# Altium PCB Bop-it_PCB.PcbDoc
Units mil, origin at the board's own origin, x right, y up, seen from the top; angles counter-clockwise.
Board outline 4115 x 4000 mil, 2 copper layers (Top Layer, Bottom Layer); 26 components, 32 nets, 143 pads, 0 vias.
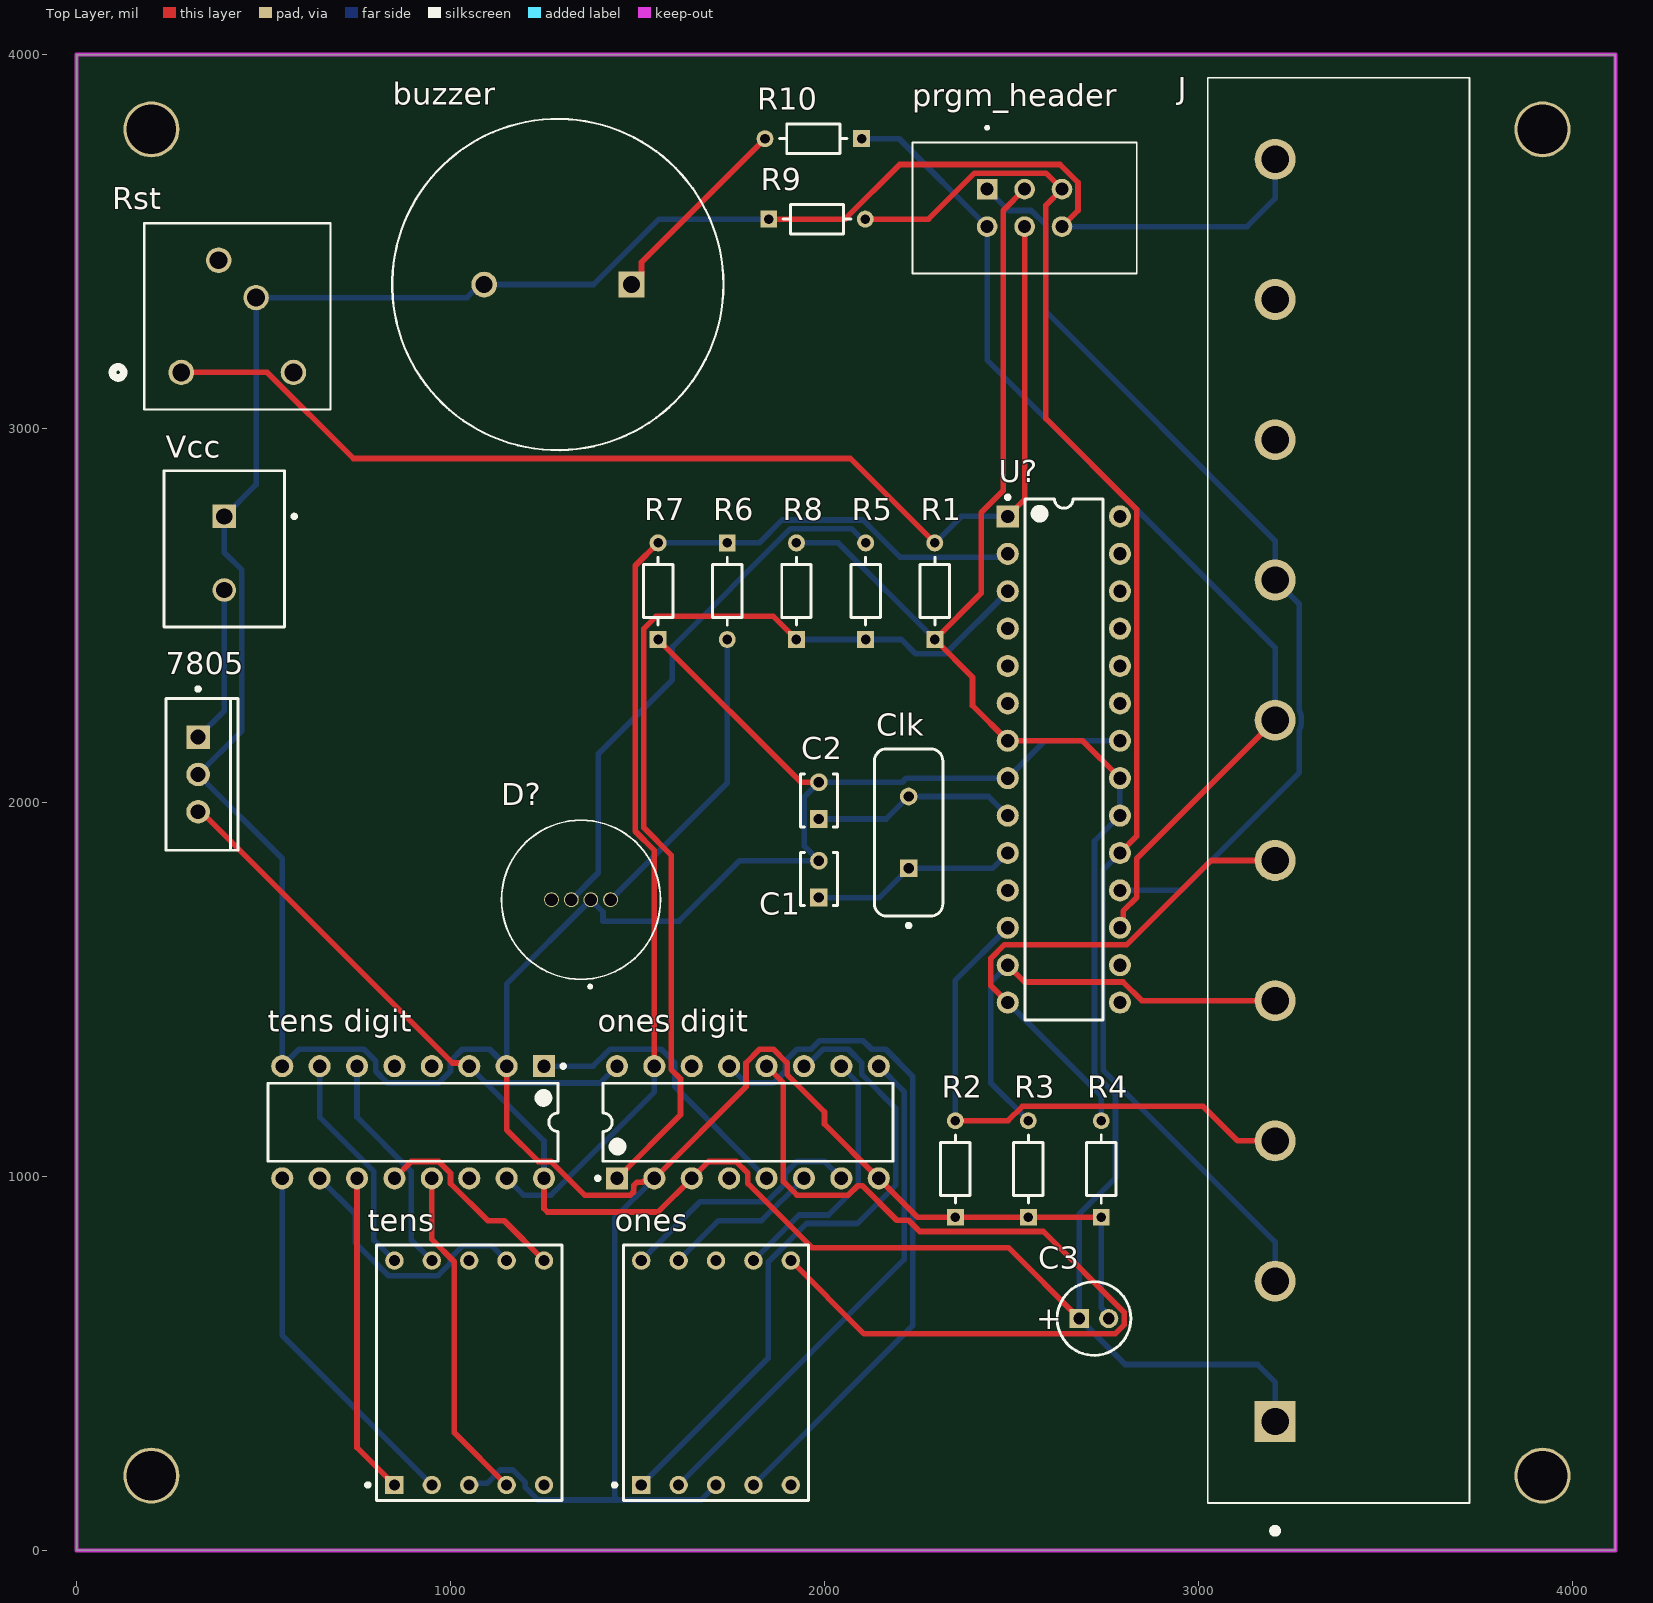
[diagram p0: Top Layer view]
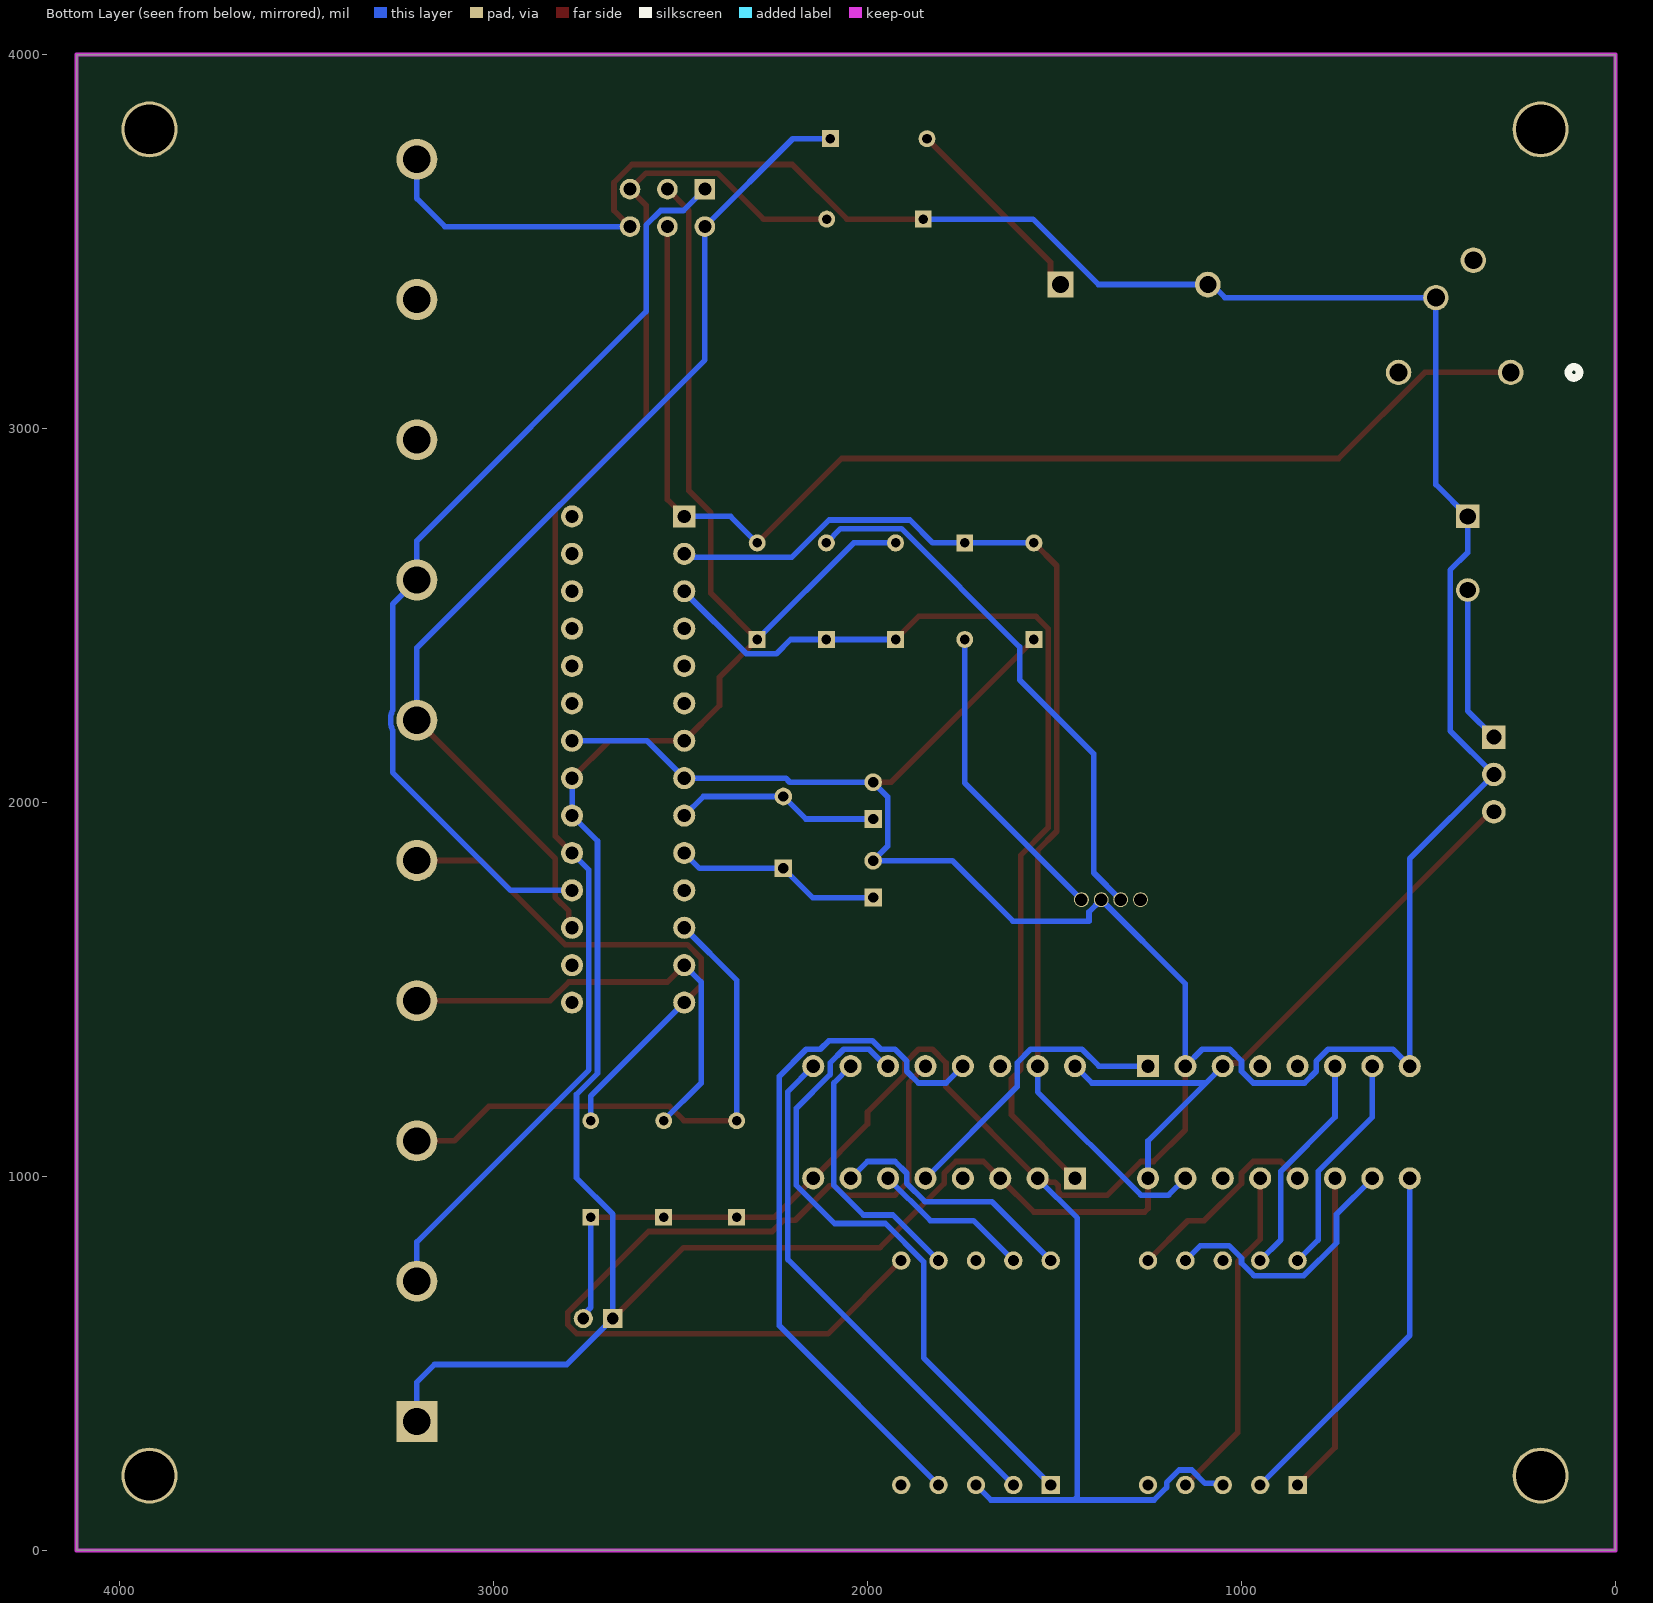
[diagram p1: Bottom Layer view, seen from below]
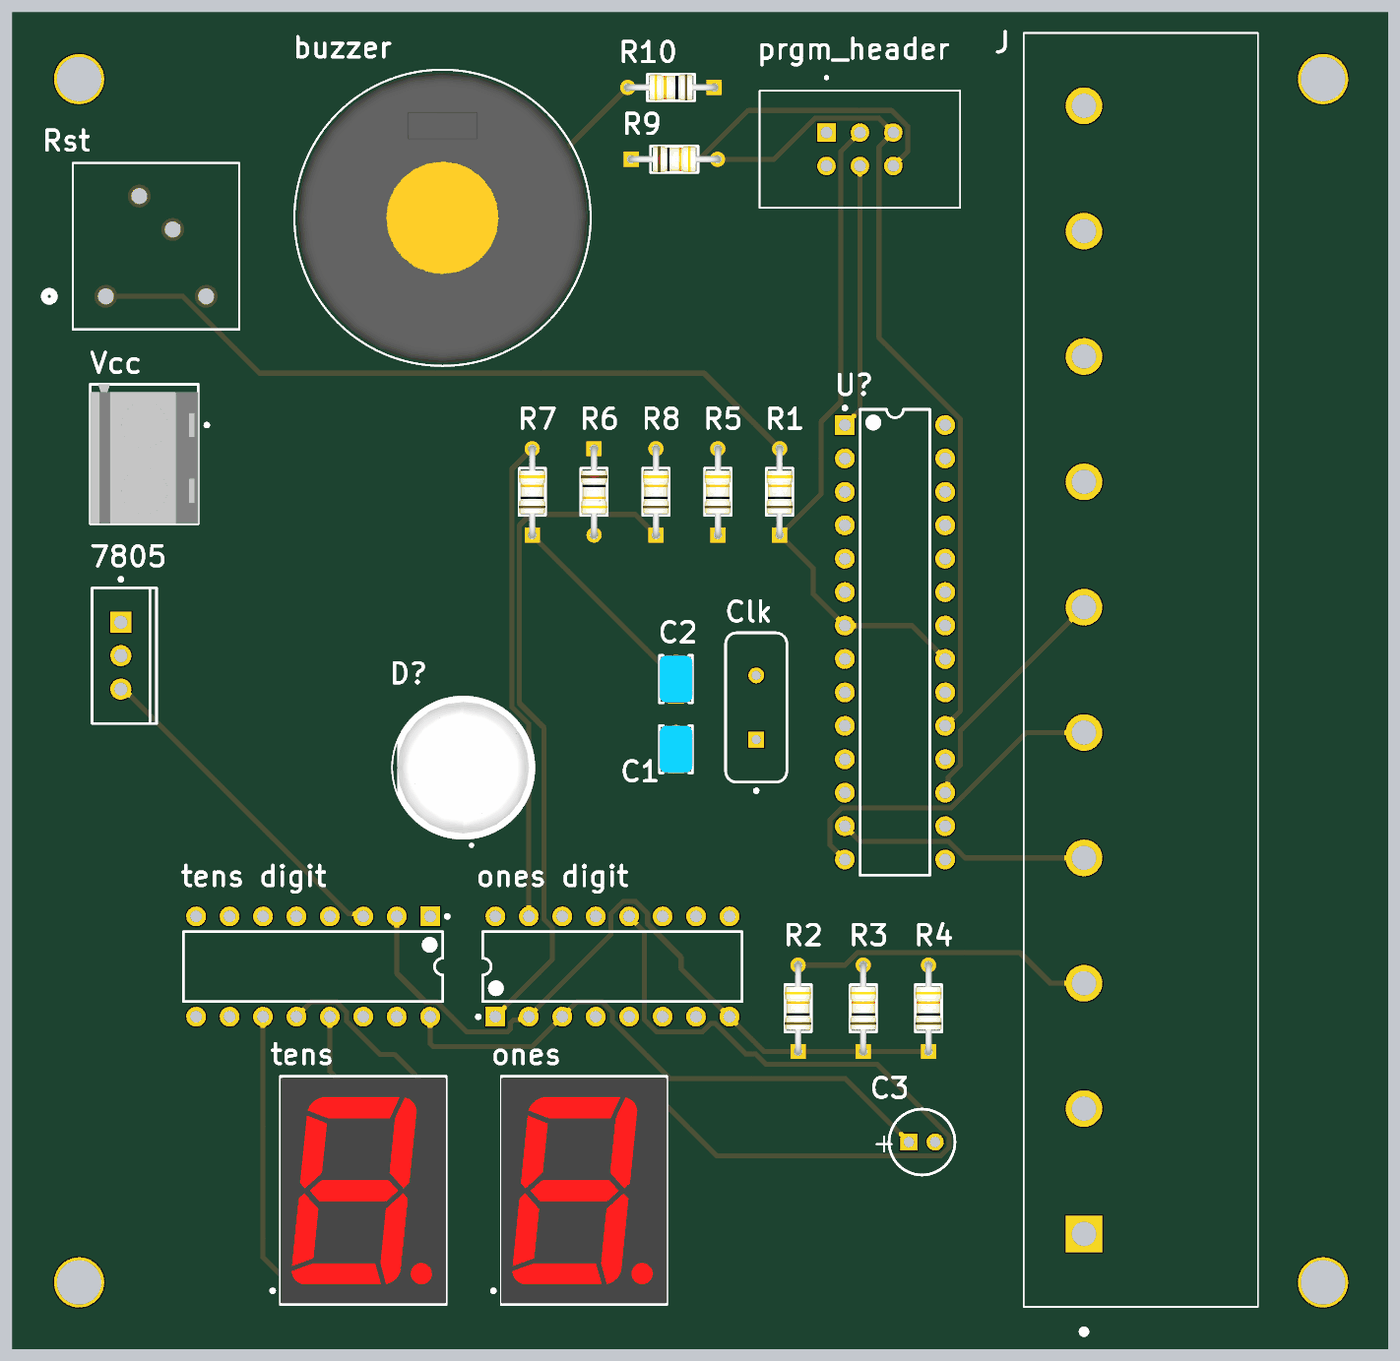
[diagram p2: 3D render of the assembled board from above, using the file's embedded part models]

## Layer stack, top to bottom
Top Solder: solder mask 0.4, Solder Resist, Dk 3.5
Top Layer: signal copper 1.4
Dielectric 1: dielectric 12.6, FR-4, Dk 4.8
Bottom Layer: signal copper 1.4
Bottom Solder: solder mask 0.4, Solder Resist, Dk 3.5

## Board outline
0,0 4115,0 4115,4000 0,4000

## Design rules (kind name [scope] priority, off if disabled: settings)
BoardOutlineClearance [All] p1: gap=7.87 ignorepadtopadclearanceinfootprint=FALSE except(15.75: Arc-SplitBarrior Arc-SplitContinuation Track-SplitBarrior Track-SplitContinuation SMDPad-SplitBarrior SMDPad-SplitContinuation THPad-SplitBarrior THPad-SplitContinuation Via-SplitBarrior Via-SplitContinuation Fill-SplitBarrior Fill-SplitContinuation Poly-SplitBarrior Poly-SplitContinuation Region-SplitBarrior Region-SplitContinuation Text-SplitBarrior Text-SplitContinuation)
Clearance "Clearance Bottom Layer" [OnLayer('Bottom Layer')] p1: gap=8 ignorepadtopadclearanceinfootprint=TRUE except(10: Arc-Text Track-Text SMDPad-Text THPad-Text Via-Text Fill-Text Poly-Text Region-Text Text-Text)
Clearance "Clearance Top Layer" [OnLayer('Top Layer')] p2: gap=8 ignorepadtopadclearanceinfootprint=TRUE except(10: Arc-Text Track-Text SMDPad-Text THPad-Text Via-Text Fill-Text Poly-Text Region-Text Text-Text)
Clearance [All] p3: gap=7.87 ignorepadtopadclearanceinfootprint=FALSE except(3.5: Arc-Arc Arc-Track Arc-SMDPad Track-Track Track-SMDPad SMDPad-SMDPad; 5: Arc-Via Track-Via SMDPad-Via THPad-Via Via-Via; 10: Arc-Text Track-Text SMDPad-Text THPad-Text Via-Text Fill-Text Poly-Text Region-Text Text-Text)
HoleSize [All] p1: absolutevalues=TRUE maxlimit=248.03 minlimit=7.87 maxpercent=80.000 minpercent=20.000
MinimumAnnularRing [All] p1: minimumring=3
MinimumSolderMaskSliver [All] p1: minsoldermaskwidth=3.94
PolygonConnect PolygonConnect_1 [All] p1: thpad.connectstyle=Relief thpad.reliefconductorwidth=20 thpad.reliefentries=4 thpad.polygonreliefangle="90 Angle" thpad.airgapwidth=10 smdpad.connectstyle=Relief smdpad.reliefconductorwidth=20 smdpad.reliefentries=4 smdpad.polygonreliefangle="90 Angle" smdpad.airgapwidth=10 via.connectstyle=Direct via.reliefconductorwidth=20 via.reliefentries=4 via.polygonreliefangle="90 Angle" via.airgapwidth=10
RoutingCorners [All] p1: cornerstyle=Round minsetback=100 maxsetback=100
RoutingVias [All] p1: holewidth=19.68 width=39.37 viastyle="Through Hole" minholewidth=7.87 minwidth=17.72 maxholewidth=39.37 maxwidth=78.74
SilkToSilkClearance [All] p1: silktosilkclearance=3.94
SilkToSolderMaskClearance [IsPad] p1: minsilkscreentomaskgap=3.94 clearancetoexposedcopper=TRUE
SolderMaskExpansion [All] p1: expansion=4 istentingtop=FALSE
Width [All] p1: maxlimit=100 minlimit=3.5 preferedwidth=15
25 further rules are at their usual default settings.

## Components (designator, comment, footprint, x,y, rotation, side; value= is the part's Value field where it differs from the comment)
7805 "MC7805CTG" ONSC-TO-220-3-221AB-01 325,2075 r0 top
buzzer "PKM22EPPH4012-B0" FP-PKM22EPPH4012-B0-MFG 1286.85,3385 r180 top
C1 "RCE5C2A220J0DBH03A" FP-RCE0DB-MFG 1985,1795 r90 top
C2 "RCE5C2A220J0DBH03A" FP-RCE0DB-MFG 1985,2005 r90 top
C3 "ECA1HM100" CAPPR55-200-1100X500X1200 2720.63,620 r0 top
Clk "FOXSLF/160-20" FOX-FOXSLF160-20 2225,1920 r90 top
D? "NTE30157" LED_NTE30157 1348.82,1740 r0 top
J "3-1437653-5" TE_3-1437653-5 3205,2032.5 r90 top
ones "HDSP-H153" FP-HDSP-H153-MFG 1710,475 r0 top
"ones digit" "CD4026BE" N0016A 1795,1145 r90 top
prgm_header "2-1761679-1" TE_2-1761679-1 2535,3590 r0 top
R1 "CF18JT10K0" FP-CF18-MFG 2295,2565 r90 top value=10kΩ
R2 "CF18JT10K0" FP-CF18-MFG 2350,1020 r90 top value=10kΩ
R3 "CF18JT10K0" FP-CF18-MFG 2545,1020 r90 top value=10kΩ
R4 "CF18JT10K0" FP-CF18-MFG 2740,1020 r90 top value=10kΩ
R5 "CF18JT10K0" FP-CF18-MFG 2110,2565 r90 top value=10kΩ
R6 "CF18JT10K0" FP-CF18-MFG 1740,2565 r270 top value=10kΩ
R7 "CF18JT10K0" FP-CF18-MFG 1555,2565 r90 top value=10kΩ
R8 "CF18JT10K0" FP-CF18-MFG 1925,2565 r90 top value=10kΩ
R9 "CF18JT10K0" FP-CF18-MFG 1980,3560 r0 top value=10kΩ
R10 "CF18JT10K0" FP-CF18-MFG 1970,3775 r180 top value=10kΩ
Rst "320.03E11BLK" 320.03E11BLK_EWI 280,3150 r0 top
tens "HDSP-H153" FP-HDSP-H153-MFG 1050,475 r0 top
"tens digit" "CD4026BE" N0016A 900,1145 r270 top
U? "ATmega328-PU" 28P3 2640,2115 r0 top
Vcc "282836-2" TECO-282836-2_V 395,2666.57 r270 top

## Footprints (in the part's own frame and the unit in brackets; to place one, negate y for a bottom-side part, rotate by r counter-clockwise, add the part's x,y. Pads: shape width x height; smd on the part's side, far side on the other; paste and mask are expansions set on the pad)
28P3 [mm] "28-Pin Plastic Dual In-Line Package (PDIP)"
  rect 1.5x1.5 hole 0.9: 1(-3.81,16.51)
  round 1.5 hole 0.9: 2(-3.81,13.97) 3(-3.81,11.43) 4(-3.81,8.89) 5(-3.81,6.35) 6(-3.81,3.81) 7(-3.81,1.27) 8(-3.81,-1.27) 9(-3.81,-3.81) 10(-3.81,-6.35) 11(-3.81,-8.89) 12(-3.81,-11.43) 13(-3.81,-13.97) 14(-3.81,-16.51) 15(3.81,-16.51) 16(3.81,-13.97) 17(3.81,-11.43) 18(3.81,-8.89) 19(3.81,-6.35) 20(3.81,-3.81) 21(3.81,-1.27) 22(3.81,1.27) 23(3.81,3.81) 24(3.81,6.35) 25(3.81,8.89) 26(3.81,11.43) 27(3.81,13.97) 28(3.81,16.51)
  silkscreen extent -3.93,-17.7 2.65,17.93, body extent -3.6,-17.65 3.6,17.65, height 4.58
320.03E11BLK_EWI [mil]
  round 68 / inner round 60 / far side round 68 hole 48 paste-34 mask-34: 1(0,0) 2(100,300) 3(200,200) 4(300,0)
  silkscreen extent -184,-99 399,399
CAPPR55-200-1100X500X1200 [mm] "THD, 2-Leads, Dia 5mm, Body Length 11mm"
  rect 1.3x1.3 hole 0.8: 1(-1,0)
  round 1.3 hole 0.8: 2(1,0)
  silkscreen extent -2.5,-2.5 2.5,2.5, body extent -2.5,-2.5 2.5,2.5, height 12
FOX-FOXSLF160-20 [mm] "THD, 2-Leads, Body 11.35x4.65mm"
  rect 1.2x1.2 hole 0.7: 1(-2.44,0)
  round 1.2 hole 0.7: 2(2.44,0)
  silkscreen extent -6.45,-2.32 5.68,2.32, body extent -5.67,-2.32 5.68,2.33, height 3.6
FP-CF18-MFG [mm]
  rect 1.15x1.15 hole 0.65 paste-1000 mask+0: 1(-3.28,0)
  round 1.15 hole 0.65 paste-1000 mask+0: 2(3.28,0)
  silkscreen extent -2.3,-1 2.3,1, body extent -3.96,-1.1 3.96,1.1, height 0.25
FP-HDSP-H153-MFG [mm]
  rect 1.25x1.25 hole 0.75 paste-1000 mask+0: 1(-5.08,-7.62)
  round 1.25 hole 0.75 paste-1000 mask+0: 2(-2.54,-7.62) 3(0,-7.62) 4(2.54,-7.62) 5(5.08,-7.62) 6(5.08,7.62) 7(2.54,7.62) 8(0,7.62) 9(-2.54,7.62) 10(-5.08,7.62)
  silkscreen extent -7.01,-8.67 6.29,8.67, body extent -6.39,-8.77 6.39,8.77, height 0.25
FP-PKM22EPPH4012-B0-MFG [mm]
  rect 1.75x1.75 hole 1.15 paste-1000 mask+0: 1(-5,0)
  round 1.75 hole 1.15 paste-1000 mask+0: 2(5,0)
  silkscreen extent -11.25,-11.25 11.25,11.25, body extent -11.35,-11.35 11.35,11.35, height 0.25
FP-RCE0DB-MFG [mm]
  rect 1.2x1.2 hole 0.7 paste-1000 mask+0: 1(-1.25,0)
  round 1.2 hole 0.7 paste-1000 mask+0: 2(1.25,0)
  silkscreen extent -1.8,-1.25 1.8,1.25, body extent -1.95,-1.35 1.95,1.35, height 0.25
LED_NTE30157 [mil]
  round 40 hole 33.86: 1(26.18,0) 2(79.18,0) 3(-25.82,0) 4(-78.82,0)
  silkscreen extent -213,-236 213,213, body extent -197,-213 213,213, height 537
N0016A [mm] "DIP, 16-Leads, Body 19.7x6.6mm, Pitch 2.54mm"
  rect 1.5x1.5 hole 0.9: 1(-3.81,8.89)
  round 1.5 hole 0.9: 2(-3.81,6.35) 3(-3.81,3.81) 4(-3.81,1.27) 5(-3.81,-1.27) 6(-3.81,-3.81) 7(-3.81,-6.35) 8(-3.81,-8.89) 9(3.81,-8.89) 10(3.81,-6.35) 11(3.81,-3.81) 12(3.81,-1.27) 13(3.81,1.27) 14(3.81,3.81) 15(3.81,6.35) 16(3.81,8.89)
  silkscreen extent -3.93,-9.85 2.65,10.31, body extent -3.95,-9.85 3.95,9.85, height 5.08
ONSC-TO-220-3-221AB-01 [mm] "FM, 3-Leads, Body 10.3x4.85mm, Pitch 2.54mm"
  rect 1.6x1.6 hole 1: 1(0,2.54)
  round 1.6 hole 1: 2(0,0) 3(0,-2.54)
  silkscreen extent -2.18,-5.15 2.72,5.92, body extent -2.16,-5.15 2.69,5.15, height 19.68
TE_2-1761679-1 [mm]
  rect 1.398x1.398 hole 0.89: 1(-2.54,1.27)
  round 1.398 hole 0.89: 2(0,1.27) 3(2.54,1.27) 4(-2.54,-1.27) 5(0,-1.27) 6(2.54,-1.27)
  silkscreen extent -7.62,-4.44 7.62,5.54
TE_3-1437653-5 [mil]
  rect 109.5x109.5 hole 73: 1(-1687.5,0)
  round 109.5 hole 73: 2(-1312.5,0) 3(-937.5,0) 4(-562.5,0) 5(-187.5,0) 6(187.5,0) 7(562.5,0) 8(937.5,0) 9(1312.5,0) 10(1687.5,0)
  silkscreen extent -1988,-520 1906,180
TECO-282836-2_V [mm] "Female Header, Pitch 5mm, 1 x 2 Position, Height 10mm"
  rect 1.6x1.6 hole 1.1: 1(-2.5,0)
  round 1.6 hole 1.1: 2(2.5,0)
  silkscreen extent -5.6,-4.1 5,4.88, body extent -5.6,-4.1 5,4.1, height 10

## Part data
7805: library part CMP-2000-04928-1, "Positive Voltage Regulator, 1 A, 5 V, 0 to 125 degC, 3-Pin TO-220, RoHS, Tube", Current, Output, Maximum=1A, Current, Quiescent Supply=6.5mA, Current, Supply=3.2mA, Dropout Voltage=2V, Manufacturer="ON Semiconductor", Package Description="3-Pin Flange Mount, Vertical Straight Lead, Body 9.97 x 4.445 mm, Pitch 2.54 mm", Package Reference=TO-220-3-221AB-01, Package Type=TO-220, Package Version="Rev. A, 11/2010", Resistance, Thermal, Junction to Case=5degC/W, Temperature, Operating, Maximum=+125degC, Temperature, Operating, Minimum=0degC, Temperature, Operating, Range=0to+125degC, Voltage, Input Range=Maximumof35V, Voltage, Input, High Level=35V, Voltage, Noise=10μV/V, Voltage, Output=5V, Datasheet URL=http://www.onsemi.com/pub_link/Collateral/MC7800-D.PDF, Datasheet Version="Rev. 27, 11/2014", Dimensions=10.28x4.82x15.75mm, Dropout Voltage Measurement Current=1A, Height=15.75mm, Length=10.28mm, Line Regulation=20mV, Load Regulation=25mV, Manufacturer URL=http://www.onsemi.com/, Mounting Type=ThroughHole, Number of Outputs=1, Number of Pins=3, Output Type=Fixed, Polarity=Positive, Regulation, Line=0.5mV, Regulation, Load=1.3mV, Regulator Function=Standard, Regulator Type=PositiveVoltageOut, Type=VoltageRegulator, Voltage, Dropout=2V, Voltage, Supply=35V, Width=4.82mm
buzzer: library part CMP-06203-000002-2, "AUDIO PIEZO TRANSDUCER 30V TH", Frequency=4kHz, Max Operating Temperature=70°C, Min Operating Temperature=-20°C, Package Quantity=750, Voltage Rating=1.5V, Contact Plating=Tin, Diameter=22mm, Height=12.5mm, Height - Seated (Max)=0.492inch, Mount="Through Hole", Packaging=Bulk, Radiation Hardening=No, Self Resonant Frequency=4kHz, Series=PK, Termination="PC Pins", Washable=No
C1 C2: library part CMP-06035-047347-1, "Cap Ceramic 22pF 100V C0G ±5% Radial 2.5mm +125°C Ammo Pack", Capacitance=22pF, Case/Package=Radial, Dielectric=C0G, Max Operating Temperature=125°C, Min Operating Temperature=-55°C, Package Quantity=2000, Ratings=AEC-Q200, Resistor Type=Ceramic, Tolerance=5%, Voltage=100V, Depth=2.5mm, Height=3.5mm, Height - Seated (Max)=0.138inch, Lead Diameter=0.5mm, Lead Pitch=0.098inch, Lead/Base Style=Straight, Length=3.6mm, Mount="Through Hole", Packaging="Tape and Reel", Termination=Radial, Voltage Rating=100V, Voltage Rating (DC)=100V, Width=0.098inch
C3: library part CMP-1665-00038-2, "Aluminum Electrolytic Capacitor, 10 uF, +/- 20%, 50 V, -40 to 85 degC, 2-Pin THD, RoHS, Bulk", Capacitance=10uF, Case/Package=Radial, Dielectric Material=Aluminium, Leakage Current=3uA, Manufacturer=Panasonic, Max Operating Temperature=85degC, Min Operating Temperature=-40degC, Package Description="2-Pin Radial Lead, Dia 5 mm, Height 12 mm", Package Quantity=200, Package Reference=CAPPR55-200-1100X500X1200, Ripple Current=65mA, Tolerance=20%, Voltage=50V, Datasheet URL=https://industrial.panasonic.com/cdbs/www-data/pdf/RDF0000/ABA0000C1218.pdf, Datasheet Version="Rev. 05, 10/2016", Diameter=5mm, Dissipation Factor=0.12%, Height=11mm, Height - Seated (Max)=0.472inch, Lead Diameter=0.5mm, Lead Free=LeadFree, Lead Pitch=2mm, Lead/Base Style=Straight, Length=11mm, Life (Hours)=2000Hour, Manufacturer URL=http://www.panasonic.com/, Mount=ThroughHole, Number of Pins=2, Packaging=Bulk, Radiation Hardening=No, REACH SVHC=NoSVHC, Ripple Current (AC)=65mA, RoHSCompliant=true, Termination=Radial, Voltage Rating=50V, Voltage Rating (DC)=50V
Clk: library part CMP-1749-00003-1, "Resistance Weld Thru-Hole Crystal, 16 MHz, -20 to 70 degC, 2-Pin THD, RoHS, Bulk", Case\Package=Axial, Max Operating Temperature="155 degC", Min Operating Temperature="-55 degC", Package Quantity=200, Power Rating="250 mW", Resistance="221 kohm", Tolerance=1%, Voltage Rating="250 V", ComponentLink1Description="Manufacturer URL", ComponentLink1URL=http://www.foxonline.com/, ComponentLink2Description=Datasheet, ComponentLink2URL=http://www.foxonline.com/pdfs/hc49slf.pdf, DatasheetVersion=Mar-15, Length="0.248 inch", Mount="Through Hole", PackageDescription="2-Pin Through Hole Device, Body 11.35 x 4.65 mm", PackageReference=FOXSLF160-20, Packaging=Bulk, RoHSCompliant=true
D?: "LED 10MM RGB COMMON ANODE", Package=None, Availability=Warning, Check_prices=https://www.snapeda.com/parts/NTE30157/NTE%20Electronics/view-part/5532260/?ref=eda, MF="NTE Electronics, Inc", MP=NTE30157, Price=None, Purchase-URL=https://pricing.snapeda.com/search/part/NTE30157/?ref=eda, SnapEDA_Link=https://www.snapeda.com/parts/NTE30157/NTE%20Electronics/view-part/5532260/?ref=snap
J: "Conn; Term Strip; Tri-Barrier; Raised; 10; 9.53 mm; Single Row; Open Bottom", Package=None, Arrow_Electronics-Purchase-URL=https://snapeda.com/shop?store=Arrow+Electronics&id=1427140, Availability=Good, BuyPart=https://www.snapeda.com/parts/6PCV-10-006/TE%20Connectivity%20AMP%20Connectors/view-part/1427140/?ref=eda, DigiKey-Purchase-URL=https://snapeda.com/shop?store=DigiKey&id=1427140, MF="TE Connectivity", Mouser-Purchase-URL=https://snapeda.com/shop?store=Mouser&id=1427140, MP=6PCV-10-006, Price=None, SnapEDA_Link=https://www.snapeda.com/parts/6PCV-10-006/TE%20Connectivity%20AMP%20Connectors/view-part/1427140/?ref=snap
ones tens: library part CMP-18395-000002-1, "LED 7-SEG 14.2MM CC RED RHD RHD", Forward Current=100mA, Forward Voltage=2V, Manufacturer=Broadcom, Power Dissipation=96mW, Reverse Voltage=15V, Temperature="-20°C to +100°C", Temperature Range High=+100°C, Temperature Range Low=-20°C, Automotive=No, Category=Disp, ComponentLink2Description=Datasheet, ComponentLink2URL=https://docs.broadcom.com/docs/AV02-1107EN, Device Class L1=Optoelectronics, Device Class L2=Displays, Device Class L3="LED Displays", Digikey Description="LED 7-SEG 14.2MM CC RED RHD RHD", Display Type=LED, Element Config="Common Cathode", Height=8mm, Lead Free=Yes, Luminous Intensity=16mcd, Manufacturer Part Number=HDSP-H153, Octopart=https://octopart.com/hdsp-h153-broadcom-71129578, Package=HDSP-H153, RoHS=TRUE, Standoff Height=1.14mm, Test Current=100mA, Viewing Angle=100°, Wavelength=637nm
"ones digit" "tens digit": library part CMP-1623-00561-2, "CMOS Decade Counter/Divider with Decoded 7-Segment Display Outputs and Display Enable, N0016A, TUBE", F @ Nom Voltage(Max)(Mhz)=8, Generic Part Number=CD4026B, ICC @ Nom Voltage(Max)(mA)=0.03, Manufacturer="Texas Instruments", Operating Temperature Range(C)="-55 to 125", Rating=Catalog, tpd @ Nom Voltage(Max)(ns)=250, Voltage(Nom)(V)=5,10,15, Bits(#)=7, Code_JEDEC=MS-001, DatasheetVersion=SCHS031B, Function=Counter, Input Type=CMOS, Inputs=1, Output Drive (IOL/IOH)(Max)(mA)=1.5/-1.5, Output Type=CMOS, PackageReference=N0016A, Schmitt Trigger=No, Technology Family=CD4000, Type=Decade, VCC(Max)(V)=18, VCC(Min)(V)=3
prgm_header: "IDC LOW PRO HDR 6P VERT BLUE", Package=None, Availability=Unavailable, Centerline_Pitch="2.54 mm[.1 in]", EU_RoHS_Compliance=Compliant, MF="TE Connectivity", MP=2-1761679-1, Number_of_Positions=6, Price=None, Product_Type=Connector, SnapEDA_Link=https://www.snapeda.com/parts/2-1761679-1/TE%20Connectivity%20AMP%20Connectors/view-part/1406669/?ref=snap, TE_purchase_URL=https://www.te.com/usa-en/product-2-1761679-1.html?te_bu=Cor&te_type=disp&te_campaign=seda_glo_cor-seda-global-disp-prtnr-fy19-seda-model-bom-cta_sma-317_1&elqCampaignId=32493
R1 R2 R3 R4 R5 R6 R7 R8 R9 R10: library part CMP-26528-000002-1, "RES 10K OHM 1/8W 5% CF AXIAL", Manufacturer="Stackpole Electronics", Package=CF18, Power Rating=0.125W, Resistance=10kΩ, Temperature="-55°C to +155°C", Temperature Coefficient=0-500ppm/°C, Temperature Range High=+155°C, Temperature Range Low=-55°C, Tolerance=5%, Voltage Rating=250V, Automotive=No, Category=Res, ComponentLink2Description=Datasheet, ComponentLink2URL=http://www.seielect.com/Catalog/SEI-CF_CFM.pdf, Composition="Carbon Film", Device Class L1="Passive Components", Device Class L2=Resistors, Device Class L3="Through-Hole Resistors", Digikey Description="RES 10K OHM 1/8W 5% CF AXIAL", Height=2mm, Ipc Land Pattern Name=RESAD656W65L360D200, Lead Free=Yes, Manufacturer Part Number=CF18JT10K0, Octopart=https://octopart.com/cf18jt10k0-stackpole+electronics-19205642, RoHS=TRUE, Series=CF
Rst: "No Description Available", Mfr_Name=E-Switch, Digi-Key_Part_Number_1=EG4366-ND
U?: library part CMP-0095-00015-2, "8-bit AVR Microcontroller, 32KB Flash, 1KB EEPROM, 2KB SRAM, 28-pin PDIP, Industrial Grade (-40°C to 85°C)", ComponentLink1Description="Manufacturer URL", ComponentLink1URL=http://www.atmel.com/, ComponentLink2Description="ATmega48A/48PA/88A/88PA/168A/168PA/328/328P Datasheet", ComponentLink2URL=http://www.atmel.com/dyn/resources/prod_documents/8271.pdf, ComponentLink3Description="ATmega48A/48PA/88A/88PA/168A/168PA/328/328P Summary", ComponentLink3URL=http://www.atmel.com/dyn/resources/prod_documents/8271S.pdf, DatasheetVersion="revD, May-2011", PackageDescription="28-lead (0.300\"/7.62mm Wide) Plastic Dual Inline Package (PDIP)", PackageReference=28P3, PackageVersion="revB, Sep-2001", RevisionNote="DatasheetVersion updated. URLs added."
Vcc: library part CMP-1684-00017-1, "Female Header, Pitch 5 mm, 1 x 2 Position, Height 10 mm, Tail Length 3.5 mm, Rohs, Bulk", Color=Green, Current=13.5A, Manufacturer="TE Connectivity", Package Description="Female Header, Pitch 5 mm, 1 x 2 Position, Height 10 mm, Tail Length 3.5 mm", Package Reference=THD, Standard Package=300, Voltage=300V, 3D Model=282836-2.pdf, Category=Connectors,Interconnects, Clamp Material - Plating=Brass-NickelPlated, Contact Material - Plating=Brass-TinPlated, Datasheet URL=http://www.te.com.cn/commerce/DocumentDelivery/DDEController?Action=showdoc&DocId=Catalog+Section%7F1308389_EUROSTYLE_TERMINAL_BLOCKS%7F0607%7Fpdf%7FEnglish%7FENG_CS_1308389_EUROSTYLE_TERMINAL_BLOCKS_0607.pdf%7F282836-2, Dynamic Catalog=BuchananSeries, Family=TerminalBlocks-WiretoBoard, Featured Product=EurostyleTerminalBlockConnectors, Features=Interlocking(Side), Housing Material=Polyamide(PA66),Nylon6/6, Manufacturer URL=http://www.te.com, Mating Orientation=HorizontalwithBoard, Mounting Type=ThroughHole, Number of Levels=1, Other Names="5ULV-02B / A98076", Packaging=Bulk, Pitch="0.197\"(5.00mm)", Positions Per Level=2, Product Training Modules=Wire-to-BoardEurostyleTerminalBlocks, RoHS Information=282836-2StatementofCompliance, Screw Material - Plating=Brass-NickelPlated, Screw Thread=M3, Series=Buchanan, Torque - Screw=0.68Nm(6Lb-In), Wire Gauge=16-30AWG, Wire Termination=Screw-RisingCageClamp

## Free pads (board coordinates)
  round 150 hole 133: 2(3920,3800) 3(3920,200) 4(200,200) 5(200,3800)

## Nets (pads, with @x,y where several pads share a name; then routed paths per layer and width w, separated by ;. In a path a pad name is that pad's centre, name@x,y a point inside that pad or via, vN(x,y) a via of type N, cw(c..) or ccw(c..) an arc to the next point about the centre after c; other vN are vias at no path point)
GND: 7805.2 "ones digit.2" "ones digit.8" "tens digit.2" "tens digit.8" buzzer.2 C1.2 C2.2 C3.2 D?.1 J.10 ones.3 prgm_header.6 R2.1 R3.1 R4.1 R7.1 R9.1 Rst.3 tens.3 U?.8 U?.22 Vcc.1 | length 13475.6
  Top Layer w15: 1150,1295 1150,1125 1234.97,1040.03 1268.65,1040.03 1358.71,949.97 1480.95,949.97 1490.03,959.05 1490.03,976.21 1498.81,985 1514.19,985 1515.76,986.57 1536.57,986.57 1545,995 1790.03,1240.03 1790.03,1303.71 1826.35,1340.03 1863.65,1340.03 1899.97,1303.71 1899.97,1272.55 2000.11,1172.42 2000.11,1139.89 2145,995 2249.13,890.87 R2.1 R3.1 R4.1 ; R7.1 1936.65,2054.21 C2.2 ; R9.1 2055.2,3560 2201.22,3706.02 2629.82,3706.02 2678.02,3657.82 2678.02,3583.02 prgm_header.6
  Bottom Layer w15: tens.3 1054.22,179.22 1097.11,179.22 1132.99,215.11 1166.61,215.11 1200,181.72 1200,168.28 1233.39,134.89 1669.89,134.89 ones.3 1670,135 1626.72,135 1626.61,134.89 ; 1447.61,134.89 1438.72,143.79 1438.72,888.72 1545,995 ; 1541.03,134.89 1541.13,135 1593.28,135 1593.39,134.89 ; R9.1 1557.66,3560 1382.66,3385 buzzer.2 1079.46,3385 1044.46,3350 Rst.3 480,2850 Vcc.1 395,2668.34 442,2621.35 442,2192 7805.2 550,1850 550,1295 595.03,1340.03 768.65,1340.03 800,1308.68 800,1281.32 831.35,1249.97 968.65,1249.97 1000,1281.32 1000,1308.68 1031.35,1340.03 1104.97,1340.03 1150,1295 1150,1515 D?.1 1407.57,1707.43 1407.57,1682.77 1611.2,1682.77 1772.65,1844.21 C1.2 1945.88,1883.33 1945.88,2015.09 C2.2 2207.82,2054.21 2218.61,2065 U?.8 2590,2165 U?.22 ; prgm_header.6 3130,3540 3205,3615 J.10 ; R4.1 2740,649.79 2760,629.79 C3.2
Net7805_1: 7805.1 Vcc.2 | length 422.1
  Bottom Layer w15: 7805.1 395,2245 Vcc.2
Net7805_3: 7805.3 "ones digit.3" "ones digit.16" "tens digit.3" "tens digit.16" C3.1 J.1 prgm_header.2 R1.1 R8.2 U?.7 U?.20 U?.21 | length 8229.4
  Top Layer w15: 7805.3 333.68,1975 1005.25,1303.43 1041.57,1303.43 1050,1295 ; 1250,995 1250,913.84 1258.79,905.06 1555.06,905.06 1645,995 1690.03,1040.03 1763.65,1040.03 1795,1008.68 1795,981.32 1966.62,809.71 2491.55,809.71 C3.1 ; prgm_header.2 2478.02,3583.02 2478.02,2834 2418.74,2774.71 2418.74,2559.6 R1.1 2395.85,2335.01 2395.85,2259.15 U?.7 2690,2165 U?.21
  Bottom Layer w15: 1050,1295 1095.03,1249.97 ; 1250,995 1250,1095 1095.03,1249.97 ; 1445,1295 1399.97,1249.97 1095.03,1249.97 ; R8.2 2036.73,2694.13 R1.1 ; U?.21 U?.20 2721.97,1896.97 2721.97,1275.5 2778.14,1219.34 2778.14,996.2 2681.26,899.32 C3.1 2804.18,497.08 3157.92,497.08 3205,450 J.1
Netbuzzer_1: buzzer.1 R10.2 | length 537.9
  Top Layer w15: buzzer.1 1510.65,3411.95 1510.65,3444.78 R10.2
NetC1_1: C1.1 Clk.1 U?.10 | length 554.4
  Bottom Layer w15: C1.1 2146.85,1745.79 Clk.1 2448.94,1823.94 U?.10
NetC2_1: C2.1 Clk.2 U?.9 | length 551.1
  Bottom Layer w15: C2.1 2164.72,1955.79 Clk.2 2438.94,2016.06 U?.9
NetD?_2: D?.2 R6.2 | length 825.1
  Bottom Layer w15: D?.2 1740,2052 R6.2
NetD?_3: D?.3 R5.2 | length 1451.7
  Bottom Layer w15: D?.3 1395,1812 1395,2130 1593.14,2328.14 1593.14,2416.21 1909.2,2732.27 2071.86,2732.27 R5.2
NetJ_2: J.2 prgm_header.3 R9.2 U?.19 | length 3861
  Top Layer w15: R9.2 2278.04,3560 2401.06,3683.02 2591.98,3683.02 prgm_header.3 2591.98,3596.98 2591.98,3026.7 2835.03,2783.65 2835.03,1910.03 U?.19
  Bottom Layer w15: U?.19 2744.97,1819.97 2744.97,1285.03 3205,825 J.2
NetJ_3: J.3 R2.2 U?.12 | length 1482.9
  Top Layer w15: R2.2 2491.07,1149.13 2529.2,1187.27 3012.73,1187.27 3105,1095 J.3
  Bottom Layer w15: R2.2 2350,1525 U?.12
NetJ_4: J.4 R3.2 U?.13 | length 1230.3
  Top Layer w15: U?.13 2535.03,1519.97 2798.71,1519.97 2848.68,1470 J.4
  Bottom Layer w15: U?.13 2444.97,1519.97 2444.97,1249.16 R3.2
NetJ_5: J.5 R4.2 U?.14 | length 1425
  Top Layer w15: U?.14 2444.97,1510.03 2444.97,1583.65 2481.29,1619.97 2808.65,1619.97 3033.68,1845 J.5
  Bottom Layer w15: U?.14 2740,1215 R4.2
NetJ_6: J.6 prgm_header.4 R10.1 U?.17 | length 2811.5
  Top Layer w15: U?.17 2798.43,1673.43 2798.43,1709.75 2835.03,1746.35 2835.03,1850.03 J.6 J.6@3213.81,2228.81
  Bottom Layer w15: R10.1 2200,3775 prgm_header.4 2435,3183.68 3205,2413.68 J.6
NetJ_7: J.7 prgm_header.1 U?.18 | length 2553
  Bottom Layer w15: prgm_header.1 2491.98,3583.02 2552.82,3583.02 2591.98,3543.86 2591.98,3313.02 3205,2700 J.7 3270,2530 3270,2246.65 cw(c3205,2220) 3270,2193.35 3270,2080.65 2954.35,1765 U?.18
"Netones digit_1": "ones digit.1" R5.1 R8.1 U?.3 | length 2679.1
  Top Layer w15: 1445,995 1615,1165 1615,1261.32 1590.03,1286.29 1590.03,1859.35 1516.86,1932.52 1516.86,2464.92 1549.52,2497.58 1863.28,2497.58 R8.1
  Bottom Layer w15: R8.1 R5.1 2205.53,2435.87 2243.67,2397.73 2324.06,2397.73 2490,2563.67 U?.3
"Netones digit_5": "ones digit.5" "tens digit.1" | length 793.9
  Bottom Layer w15: 1250,1295 1381.32,1295 1426.35,1340.03 1563.65,1340.03 1599.97,1303.71 1599.97,1240.03 1845,995
"Netones digit_6": "ones digit.6" ones.9 | length 426.1
  Bottom Layer w15: ones.9 1717.03,882.03 1832.03,882.03 1945,995
"Netones digit_7": "ones digit.7" ones.10 | length 679.5
  Bottom Layer w15: ones.10 1667.69,932.69 1846.37,932.69 1895,981.32 1895,1008.68 1926.35,1040.03 1999.97,1040.03 2045,995
"Netones digit_9": "ones digit.9" ones.2 | length 1398
  Bottom Layer w15: ones.2 2213.03,778.03 2213.03,1226.97 2145,1295
"Netones digit_10": "ones digit.10" ones.7 | length 700.7
  Bottom Layer w15: ones.7 1932.09,897.09 2010.77,897.09 2090.03,976.35 2090.03,1249.97 2045,1295
"Netones digit_11": "ones digit.11" ones.1 | length 1715.7
  Bottom Layer w15: ones.1 1850.11,515.11 1850.11,771.83 1952.37,874.09 2087.77,874.09 2190.03,976.35 2190.03,1182.5 2099.97,1272.55 2099.97,1303.71 2063.65,1340.03 1996.18,1340.03 1951.15,1295 1945,1295
"Netones digit_12": "ones digit.12" ones.6 | length 2420.2
  Top Layer w15: 1845,1295 1890.03,1249.97 1890.03,986.29 1926.35,949.97 2063.65,949.97 2088.79,975.11 2101.21,975.11 2193.32,883 2224.47,883 2254.74,852.73 2585.38,852.73 2801.09,637.02 2801.09,602.98 2777.02,578.91 2106.09,578.91 ones.6
"Netones digit_13": "ones digit.13" ones.4 | length 1881.2
  Bottom Layer w15: 1745,1295 1790.03,1249.97 1863.65,1249.97 1895,1281.32 1895,1308.68 1926.35,1340.03 1963.65,1340.03 1986.65,1363.03 2103.35,1363.03 2126.35,1340.03 2163.65,1340.03 2236.03,1267.65 2236.03,601.03 ones.4
"Netones digit_15": "ones digit.15" "tens digit.15" R6.1 R7.2 U?.2 | length 3047.6
  Top Layer w15: 1545,1295 1545,1871.85 1493.86,1922.99 1493.86,2633 R7.2
  Bottom Layer w15: 1150,995 1195.03,949.97 1268.65,949.97 1545,1226.32 1545,1295 ; R7.2 R6.1 1825.43,2694.13 1886.56,2755.27 2102.8,2755.27 2202.07,2656 2469.07,2656 2478.08,2665 U?.2
Netprgm_header_5: prgm_header.5 R1.2 Rst.1 U?.1 | length 3221.8
  Top Layer w15: Rst.1 510,3150 740.1,2919.89 2069.24,2919.89 R1.2 ; U?.1 2535,2810 prgm_header.5
  Bottom Layer w15: R1.2 2365.87,2765 U?.1
"Nettens digit_6": "tens digit.6" tens.9 | length 602.8
  Bottom Layer w15: 750,1295 750,1158.68 895.03,1013.65 895.03,829.97 tens.9
"Nettens digit_7": "tens digit.7" tens.10 | length 602.8
  Bottom Layer w15: 650,1295 650,1158.68 795.03,1013.65 795.03,829.97 tens.10
"Nettens digit_9": "tens digit.9" tens.2 | length 985.7
  Bottom Layer w15: 550,995 550,575 tens.2
"Nettens digit_10": "tens digit.10" tens.7 | length 710.4
  Bottom Layer w15: 650,995 745.91,899.09 745.91,822.37 833.39,734.89 966.61,734.89 1000,768.28 1000,781.72 1033.39,815.11 1109.89,815.11 tens.7
"Nettens digit_11": "tens digit.11" tens.1 | length 861.4
  Top Layer w15: 750,995 750,275 tens.1
"Nettens digit_12": "tens digit.12" tens.6 | length 544.5
  Top Layer w15: 850,995 895.03,1040.03 968.65,1040.03 1000,1008.68 1000,981.32 1099.89,881.43 1143.57,881.43 tens.6
"Nettens digit_13": "tens digit.13" tens.4 | length 902.8
  Top Layer w15: 950,995 950,831.72 1009.89,771.83 1009.89,315.11 tens.4
pads on no net: "ones digit.4" "ones digit.14" "tens digit.4" "tens digit.5" "tens digit.14" D?.4 J.8 J.9 ones.5 ones.8 Rst.2 Rst.4 tens.5 tens.8 U?.4 U?.5 U?.6 U?.11 U?.15 U?.16 U?.23 U?.24 U?.25 U?.26 U?.27 U?.28

## Keep-outs
Keep-Out Layer:
  the board outline again, w10

## Text inside footprints (layer, text, board x,y; h text height)
C3: Top Overlay "+" at 2566.77,590.98 h59.06